# Altium PCB ESP8266to32-2.PcbDoc
Units mm, origin at the board's own origin, x right, y up, seen from the top; angles counter-clockwise.
Board outline 26.4 x 17.7 mm, 4 copper layers (Top Layer, Internal Plane 1, Internal Plane 2, Bottom Layer), stack 0.462 mm thick; 1 components, 0 nets, 44 pads, 1 vias.
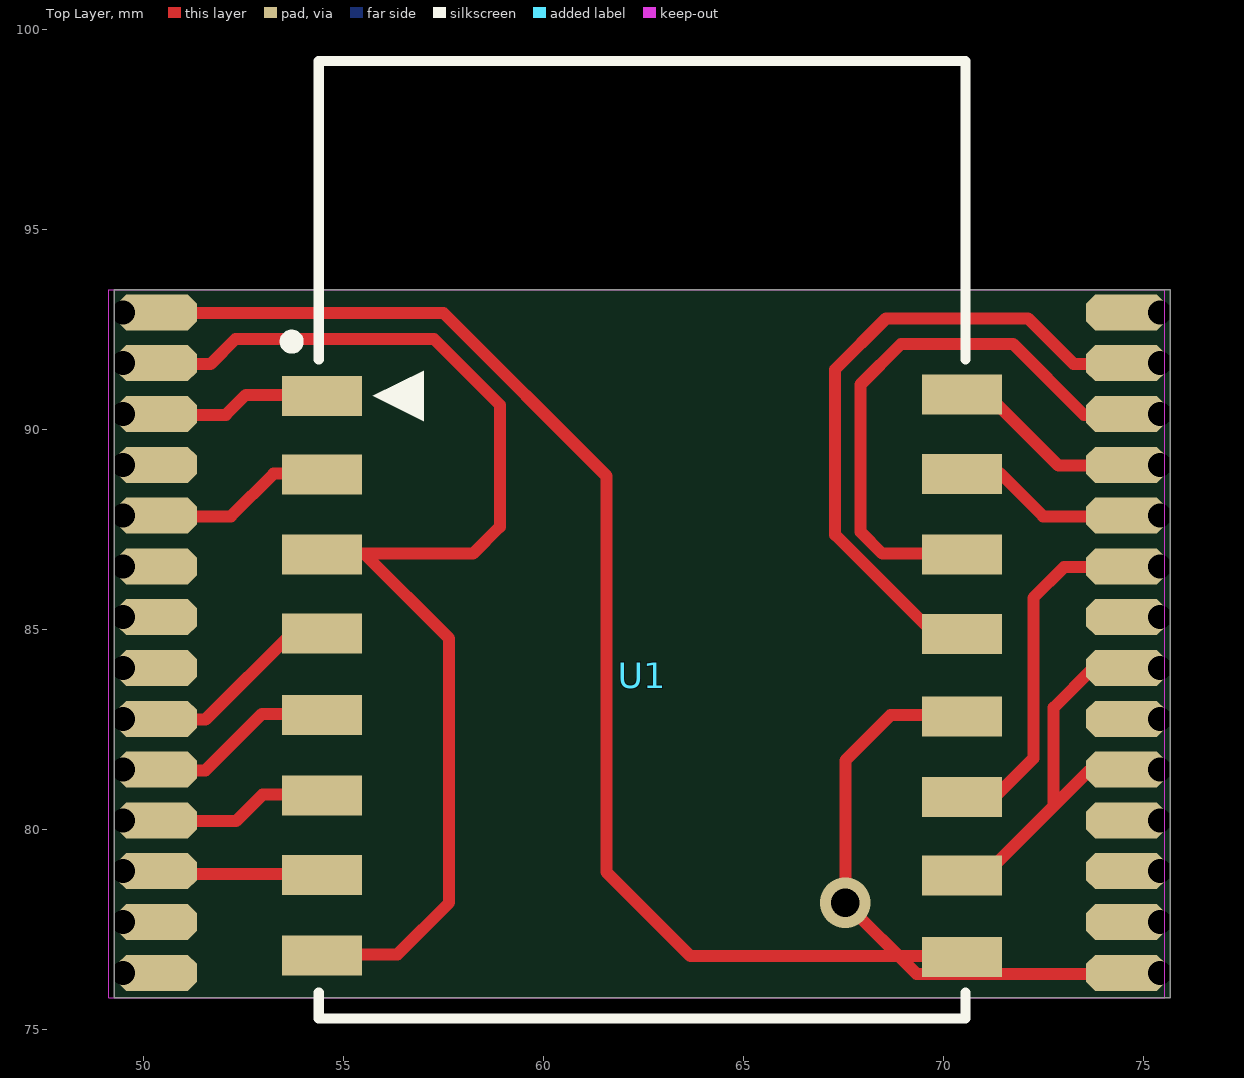
[diagram p0: Top Layer view]
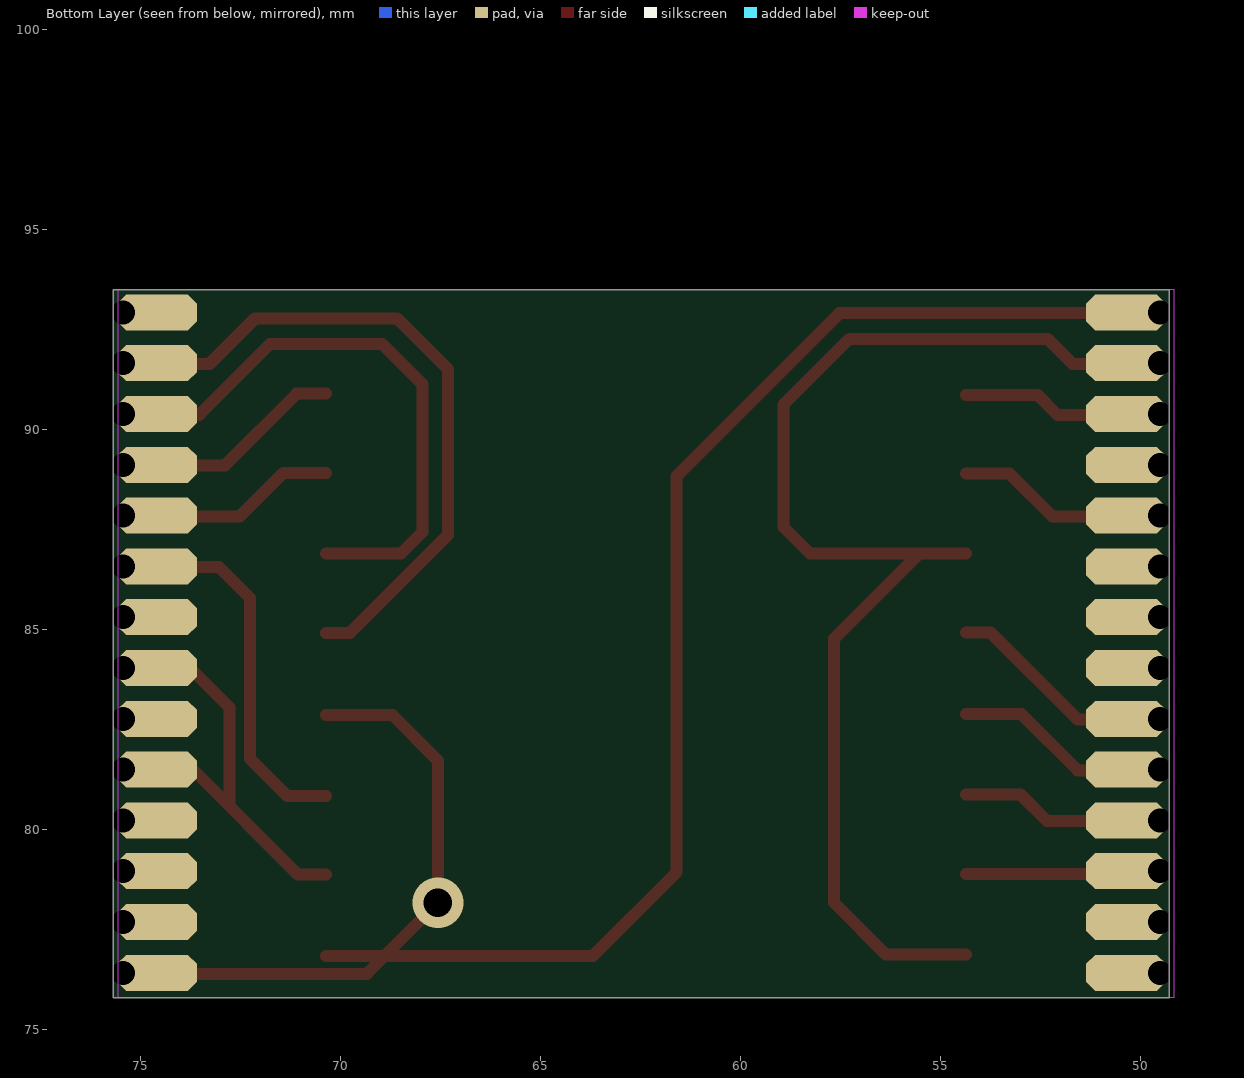
[diagram p1: Bottom Layer view, seen from below]
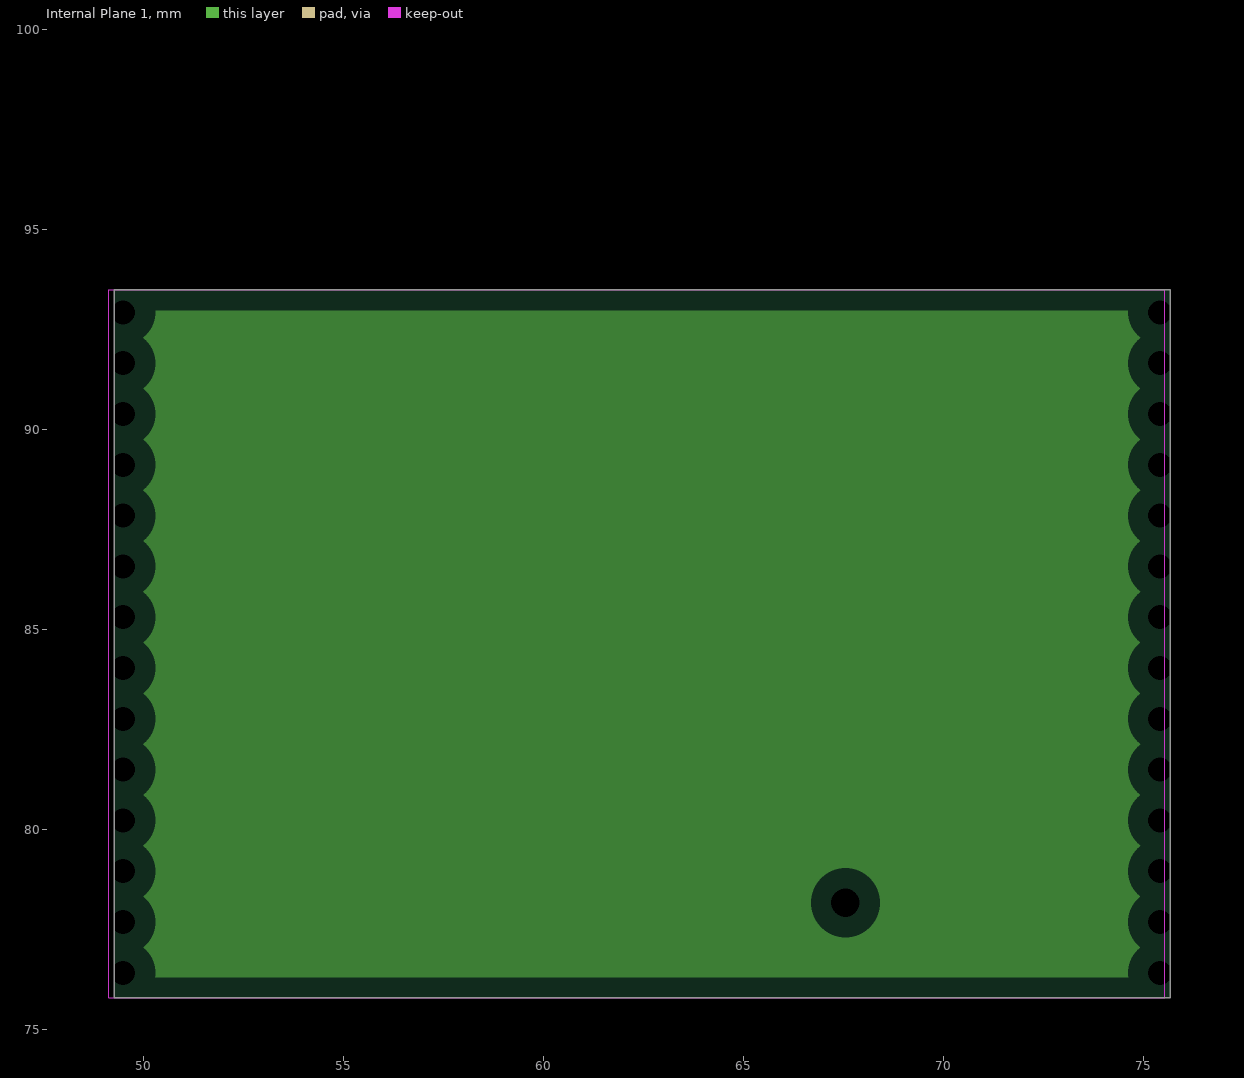
[diagram p2: Internal Plane 1, clearances drawn from the general rule]
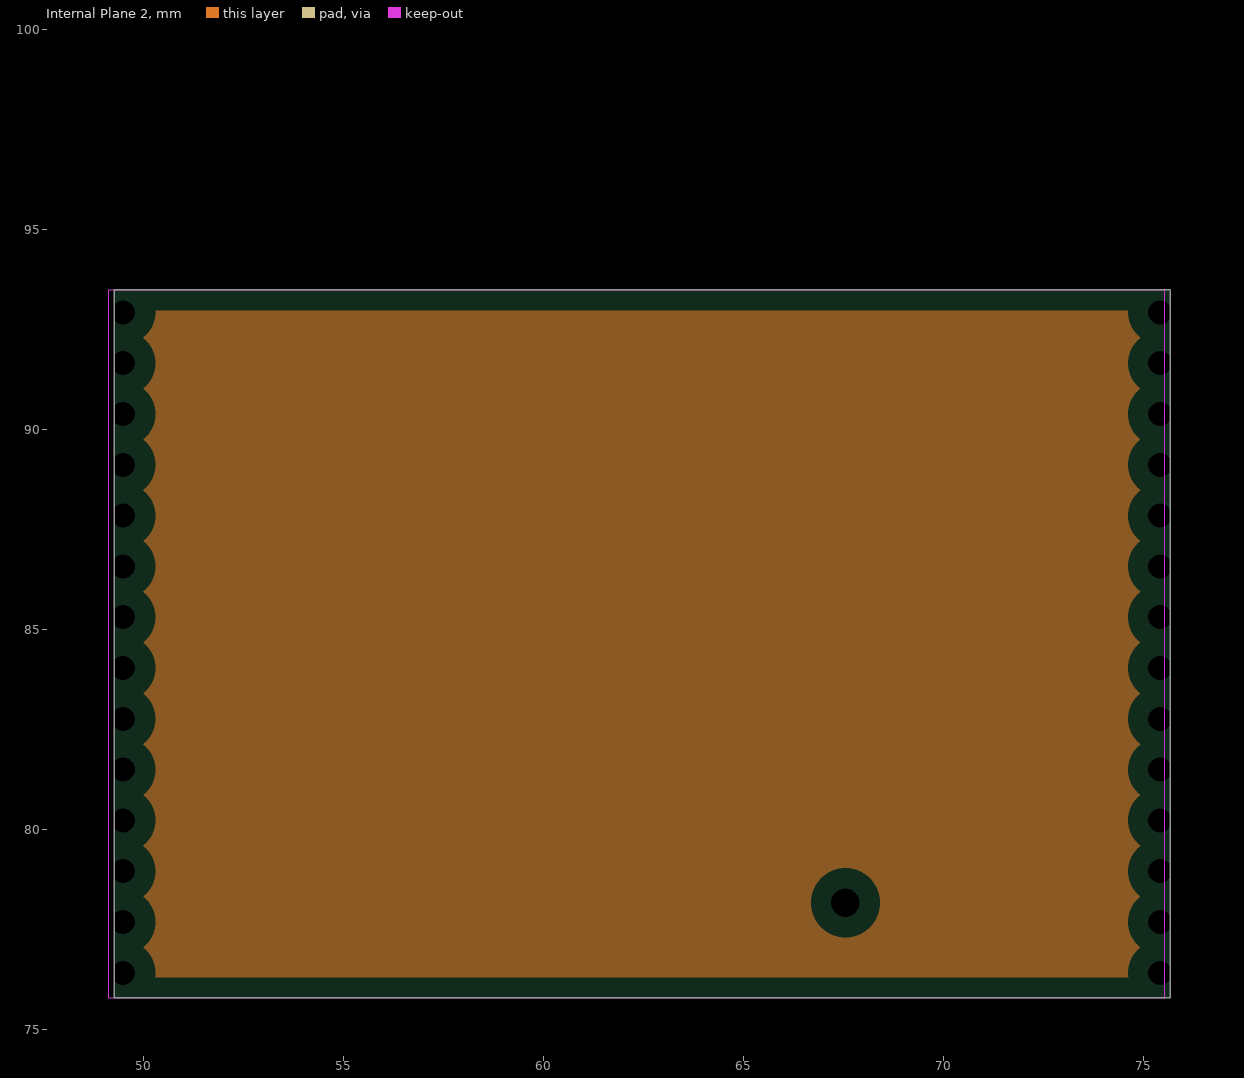
[diagram p3: Internal Plane 2, clearances drawn from the general rule]

## Layer stack, top to bottom
Top Solder: solder mask 0.0102, Solder Resist, Dk 3.5
Top Layer: signal copper 0.0356
Internal Plane 1: plane copper 0.0356
Internal Plane 2: plane copper 0.0356
Dielectric 1: dielectric 0.32, FR-4, Dk 4.8
Bottom Layer: signal copper 0.0356
Bottom Solder: solder mask 0.0102, Solder Resist, Dk 3.5

## Board outline
49.276,75.795 75.676,75.795 75.676,93.495 49.276,93.495

## Design rules (kind name [scope] priority, off if disabled: settings)
Clearance [All] p1: gap=0.203 ignorepadtopadclearanceinfootprint=FALSE
PlaneClearance [All] p1: clearance=0.508
PlaneConnect [All] p1: planeconnectstyle=Relief reliefexpansion=0.508 reliefentries=4 reliefconductorwidth=0.254 reliefairgap=0.254
PolygonConnect [All] p1: connectstyle=Relief reliefconductorwidth=0.254 reliefentries=4 polygonreliefangle="90 Angle" airgapwidth=0.254
RoutingVias [All] p1: holewidth=0.635 width=1.016 viastyle="Through Hole" minholewidth=0.711 minwidth=1.27 maxholewidth=0.711 maxwidth=1.27
SolderMaskExpansion [All] p1: expansion=0.102
Width [All] p1: maxlimit=0.203 minlimit=0.203 preferedwidth=0.203
28 further rules are at their usual default settings.

## Components (designator, comment, footprint, x,y, rotation, side; value= is the part's Value field where it differs from the comment)
U1 "ESP-8266" ESP_12E 54.427,99.178 r0 top

## Footprints (in the part's own frame and the unit in brackets; to place one, negate y for a bottom-side part, rotate by r counter-clockwise, add the part's x,y. Pads: shape width x height; smd on the part's side, far side on the other; paste and mask are expansions set on the pad)
ESP_12E [mm]
  rect 2x1 smd: 1(0.051,-8.331) 2(0.051,-10.301) 3(0.051,-12.301) 4(0.051,-14.271) 5(0.051,-16.311) 6(0.051,-18.321) 7(0.051,-20.311) 8(0.051,-22.321) 9(16.051,-22.361) 10(16.051,-20.321) 11(16.051,-18.361) 12(16.051,-16.341) 13(16.051,-14.281) 14(16.051,-12.301) 15(16.051,-10.281) 16(16.051,-8.301)
  silkscreen extent -0.86,-23.9 16.13,0.04, body extent 0.05,-23.88 16.05,0.5, height 2.6

## Free pads (board coordinates)
  oct 2x0.9 hole 0.6 copper offset 0.85,0: 1(49.501,92.935) 2(49.501,91.665) 3(49.501,90.395) 4(49.501,89.125) 5(49.501,87.855) 6(49.501,86.585) 7(49.501,85.315) 8(49.501,84.045) 9(49.501,82.775) 10(49.501,81.505) 11(49.501,80.235) 12(49.501,78.965) 13(49.501,77.695) 14(49.501,76.425)
  oct 2x0.9 hole 0.6 copper offset -0.85,0: 25(75.427,76.425) 26(75.427,77.695) 27(75.427,78.965) 28(75.427,80.235) 29(75.427,81.505) 30(75.427,82.775) 31(75.427,84.045) 32(75.427,85.315) 33(75.427,86.585) 34(75.427,87.855) 35(75.427,89.125) 36(75.427,90.395) 37(75.427,91.665) 38(75.427,92.935)

## Via types
v1: diameter 1.27, hole 0.711, Top Layer to Bottom Layer, 1 vias

## Nets (pads, with @x,y where several pads share a name; then routed paths per layer and width w, separated by ;. In a path a pad name is that pad's centre, name@x,y a point inside that pad or via, vN(x,y) a via of type N, cw(c..) or ccw(c..) an arc to the next point about the centre after c; other vN are vias at no path point)
pads on no net: U1.1 U1.2 U1.3 U1.4 U1.5 U1.6 U1.7 U1.8 U1.9 U1.10 U1.11 U1.12 U1.13 U1.14 U1.15 U1.16
copper on no net: | length 165.2
  Top Layer w0.3: 50.087,78.946 50.139,78.894 54.351,78.894 ; 50.087,80.216 52.324,80.216 52.992,80.884 54.351,80.884 ; 50.087,81.486 51.562,81.486 52.97,82.894 54.351,82.894 ; 50.087,82.756 51.562,82.756 53.74,84.934 54.351,84.934 ; 50.087,87.836 52.197,87.836 53.265,88.904 54.351,88.904 ; 50.087,90.376 52.07,90.376 52.568,90.874 54.351,90.874 ; 50.087,91.646 51.689,91.646 52.317,92.274 57.27,92.274 58.921,90.623 58.921,87.575 58.25,86.904 55.528,86.904 ; 50.087,92.916 57.517,92.916 61.588,88.845 61.588,78.939 63.683,76.844 70.351,76.844 ; 54.351,76.884 56.358,76.884 57.651,78.177 57.651,84.781 55.528,86.904 ; 54.351,86.904 55.528,86.904 ; 70.351,78.884 71.058,78.884 73.66,81.486 74.413,81.486 ; 70.351,80.844 71.319,80.844 72.256,81.781 72.256,85.797 73.025,86.566 74.413,86.566 ; 70.351,82.864 68.688,82.864 67.557,81.733 v1(67.557,78.177) 69.335,76.399 75.304,76.399 ; 70.351,84.924 69.755,84.924 67.303,87.376 67.303,91.512 68.573,92.782 72.129,92.782 73.265,91.646 74.413,91.646 ; 70.351,86.904 68.482,86.904 67.938,87.448 67.938,91.131 68.954,92.147 71.748,92.147 73.519,90.376 74.413,90.376 ; 70.351,88.924 71.415,88.924 72.503,87.836 74.413,87.836 ; 70.351,90.904 71.086,90.904 72.884,89.106 74.413,89.106 ; 72.764,80.59 72.764,83.052 73.738,84.026 74.413,84.026

## Keep-outs
Keep-Out Layer:
  lines w0: 49.149,75.795 75.549,75.795 75.549,93.495 49.149,93.495 49.149,75.795

## Text inside footprints (layer, text, board x,y; h text height)
U1: Mechanical 13 "ANTENNA AREA" at 54.605,98.721 h0.25; Mechanical 13 "CUTOUT POLYGON" at 54.605,98.213 h0.25